# EAGLE board layout2 (EAGLE 6.5.0)
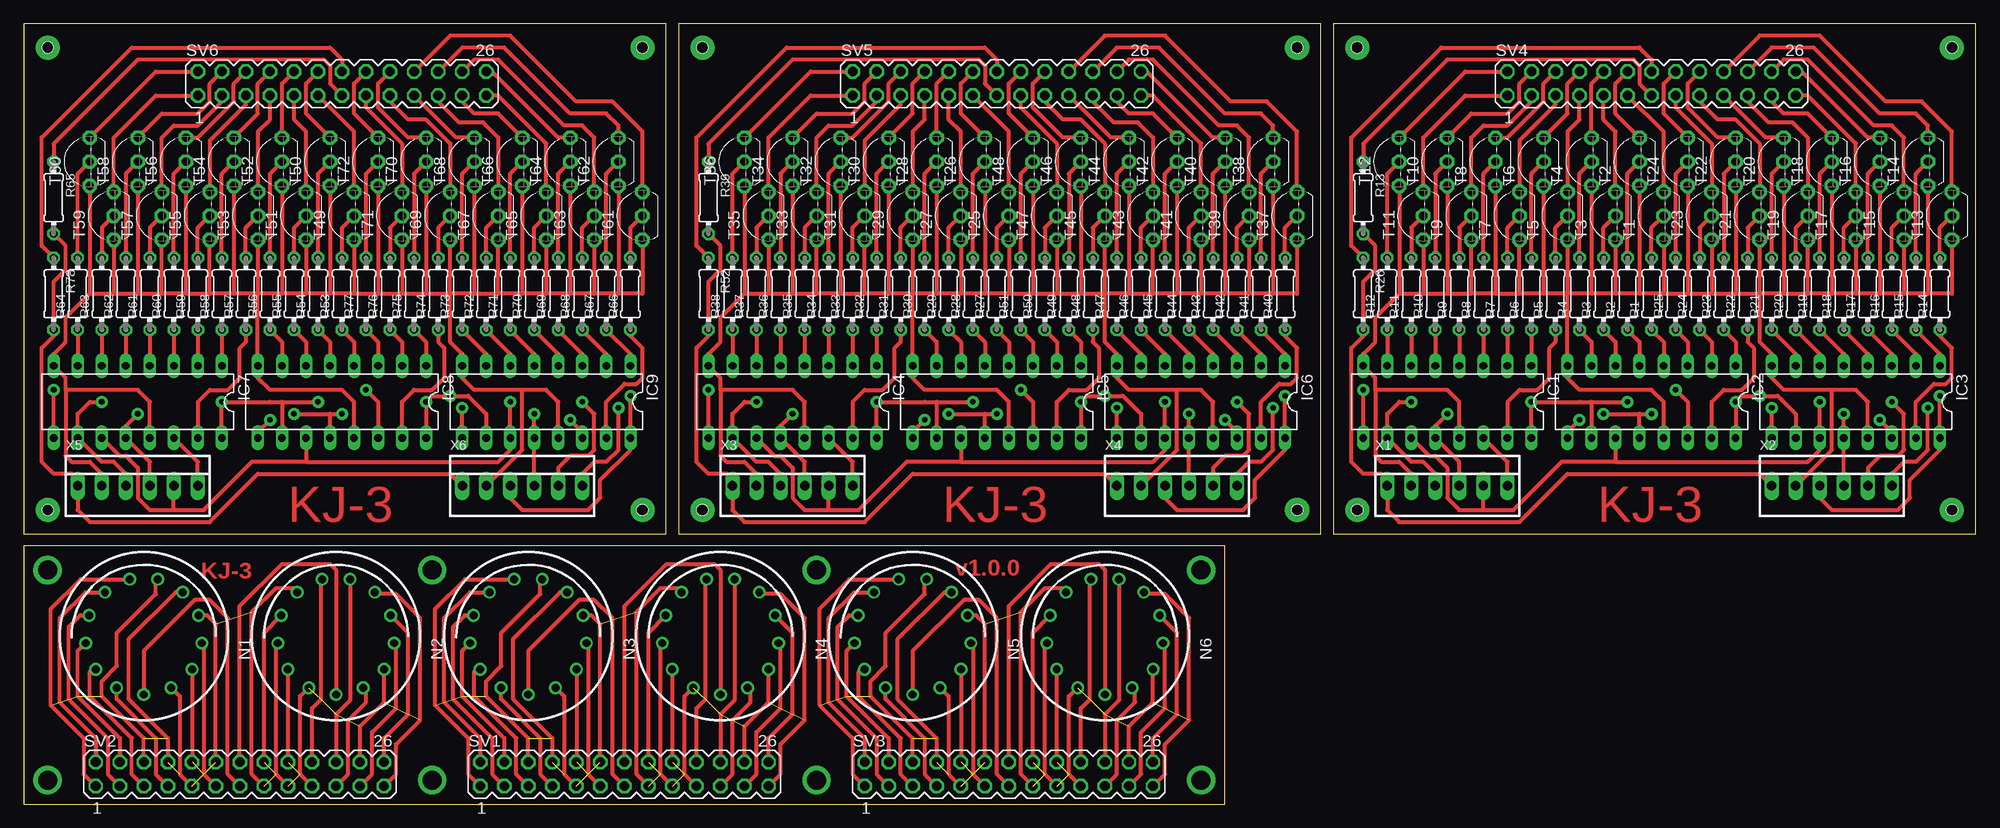
[diagram p0: board, top side]
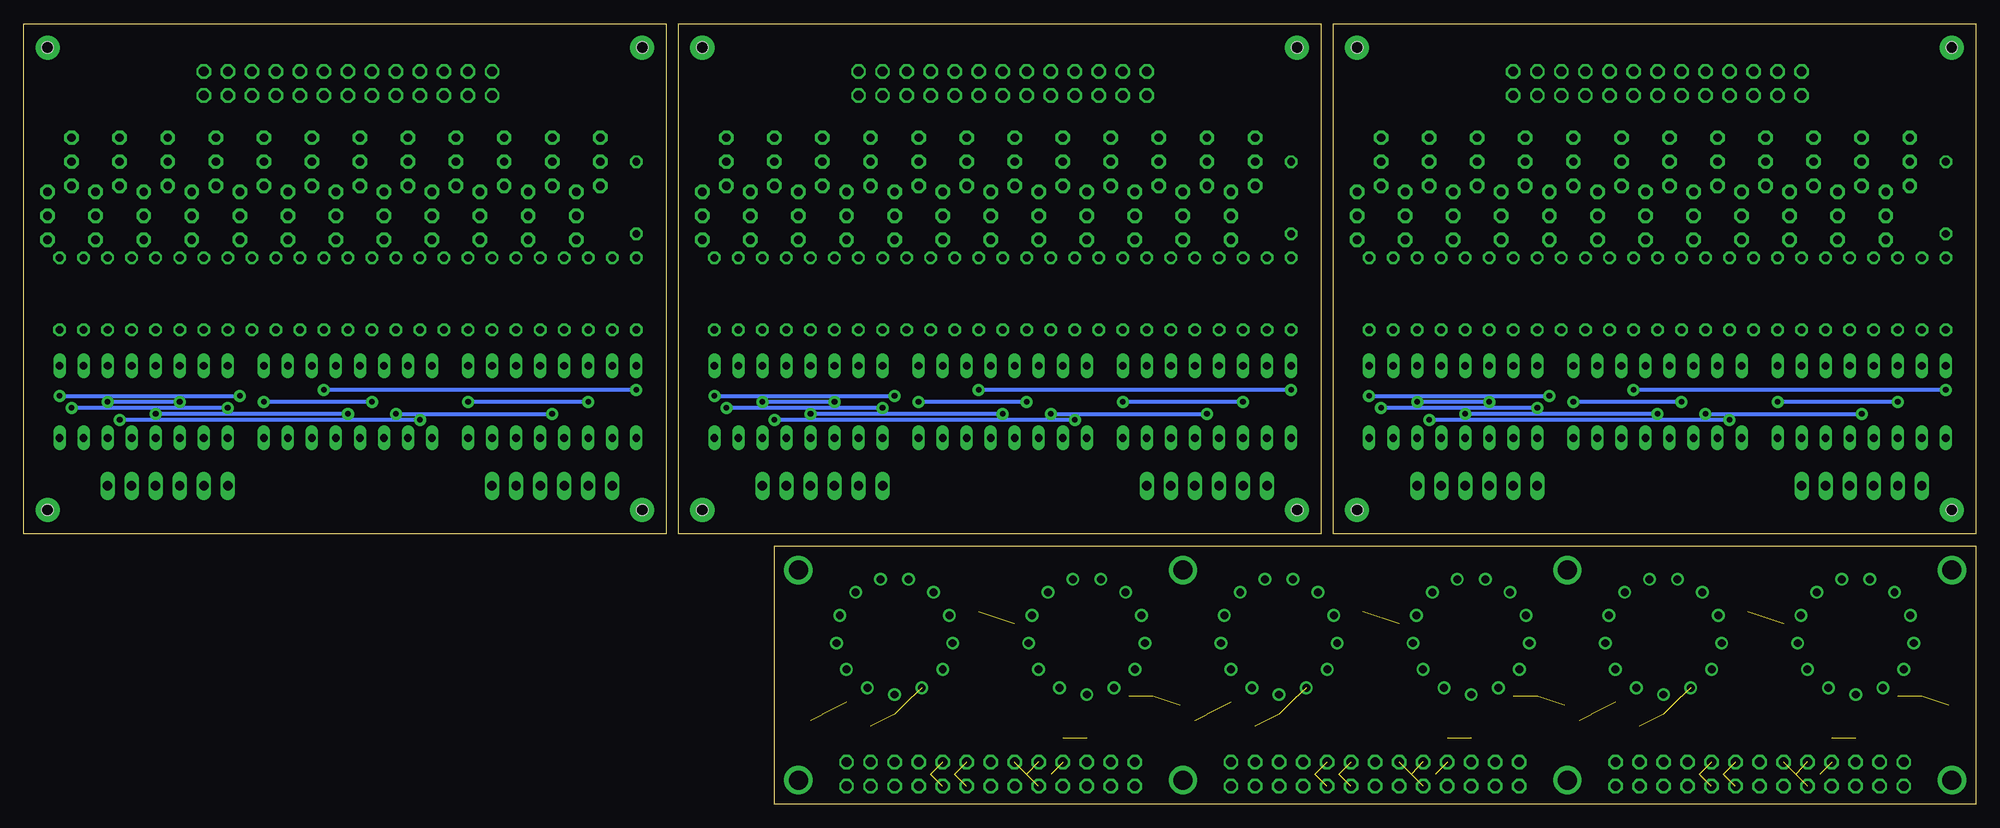
[diagram p1: board, bottom side, seen from below]

Size 206.36 x 82.54 mm. Coordinates in mm from the lower left corner, seen from the top.
Outline: 0,0 126.99,0 126.99,27.3 0,27.3 0,0
Outline: 138.43,28.57 206.36,28.57 206.36,82.54 138.43,82.54 138.43,28.57
Outline: 69.22,28.57 137.15,28.57 137.15,82.54 69.22,82.54 69.22,28.57
Outline: 0,28.57 67.93,28.57 67.93,82.54 0,82.54 0,28.57
Copper layers (1*16): Top 0.035mm / dielectric 1.5mm / Bottom 0.035mm
Design rules "default": minimum track width 10mil, minimum drill 24mil, track to track 8mil, track to pad 8mil, pad to pad 8mil, via to via 8mil, smd to smd 8mil, copper to edge 40mil, drill to drill 8mil, minimum pad ring 10mil, minimum via ring 8mil, stop-mask expansion 4mil, vias tented up to drill 0mil, thermal gap 10mil
Holes 1.2 mm at 140.97,31.11 140.97,80.01 203.83,80.01 203.83,31.11 71.76,31.11 71.76,80.01 134.62,80.01 134.62,31.11 2.54,31.11 2.54,80.01 65.41,80.01 65.41,31.11

## Footprints (pad centres in the part's own frame; a part is rotated, then mirrored left to right if it is on the bottom)
DIL16 = drill 0.813 long: 1 -8.89,-3.81; 2 -6.35,-3.81; 3 -3.81,-3.81; 4 -1.27,-3.81; 5 1.27,-3.81; 6 3.81,-3.81; 7 6.35,-3.81; 8 8.89,-3.81; 9 8.89,3.81; 10 6.35,3.81; 11 3.81,3.81; 12 1.27,3.81; 13 -1.27,3.81; 14 -3.81,3.81; 15 -6.35,3.81; 16 -8.89,3.81
IN-14 = drill 0.84: 0 5.094,-3.516; 1 -5.094,-3.516; 2 -6.145,-0.746; 3 -5.788,2.195; 4 -4.105,4.633; 5 -1.481,6.01; 6 1.481,6.01; 7 4.105,4.633; 8 5.788,2.195; 9 6.145,-0.746; A 0,-6.19; LHDP 2.877,-5.481; RHDP -2.877,-5.481
0204/7 = drill 0.813 octagon: 1 -3.81,0; 2 3.81,0
MA13-2 = drill 1.016 octagon: 1 -15.24,-1.27; 2 -15.24,1.27; 3 -12.7,-1.27; 4 -12.7,1.27; 5 -10.16,-1.27; 6 -10.16,1.27; 7 -7.62,-1.27; 8 -7.62,1.27; 9 -5.08,-1.27; 10 -5.08,1.27; 11 -2.54,-1.27; 12 -2.54,1.27; 13 0,-1.27; 14 0,1.27; 15 2.54,-1.27; 16 2.54,1.27; 17 5.08,-1.27; 18 5.08,1.27; 19 7.62,-1.27; 20 7.62,1.27; 21 10.16,-1.27; 22 10.16,1.27; 23 12.7,-1.27; 24 12.7,1.27; 25 15.24,-1.27; 26 15.24,1.27
TO92-EBC = drill 0.889 pad 1.524 octagon: B 0,-1.27; C 2.54,-1.27; E -2.54,-1.27
22-23-2061 = drill 1 long: 1 -6.35,0; 2 -3.81,0; 3 -1.27,0; 4 1.27,0; 5 3.81,0; 6 6.35,0

## Placement (x,y rotation side)
IC1  74LS595N  [DIL16]  150.49,42.54 180 top
IC2  74LS595N  [DIL16]  172.08,42.54 180 top
IC3  74LS595N  [DIL16]  193.67,42.54 180 top
IC4  74LS595N  [DIL16]  81.28,42.54 180 top
IC5  74LS595N  [DIL16]  102.87,42.54 180 top
IC6  74LS595N  [DIL16]  124.46,42.54 180 top
IC7  74LS595N  [DIL16]  12.07,42.54 180 top
IC8  74LS595N  [DIL16]  33.65,42.54 180 top
IC9  74LS595N  [DIL16]  55.24,42.54 180 top
N1  IN-14  [IN-14]  12.7,17.78 0 top
N2  IN-14  [IN-14]  33.02,17.78 0 top
N3  IN-14  [IN-14]  53.34,17.78 0 top
N4  IN-14  [IN-14]  73.66,17.78 0 top
N5  IN-14  [IN-14]  93.98,17.78 0 top
N6  IN-14  [IN-14]  114.3,17.78 0 top
R1  [0204/7]  172.08,53.97 90 top
R2  [0204/7]  169.54,53.97 90 top
R3  [0204/7]  167,53.97 90 top
R4  [0204/7]  164.47,53.97 90 top
R5  [0204/7]  161.92,53.97 90 top
R6  [0204/7]  159.38,53.97 90 top
R7  [0204/7]  156.84,53.97 90 top
R8  [0204/7]  154.3,53.97 90 top
R9  [0204/7]  151.76,53.97 90 top
R10  [0204/7]  149.22,53.97 90 top
R11  [0204/7]  146.69,53.97 90 top
R12  [0204/7]  144.14,53.97 90 top
R13  [0204/7]  141.6,64.13 270 top
R14  [0204/7]  202.56,53.97 90 top
R15  [0204/7]  200.02,53.97 90 top
R16  [0204/7]  197.48,53.97 90 top
R17  [0204/7]  194.94,53.97 90 top
R18  [0204/7]  192.41,53.97 90 top
R19  [0204/7]  189.86,53.97 90 top
R20  [0204/7]  187.32,53.97 90 top
R21  [0204/7]  184.78,53.97 90 top
R22  [0204/7]  182.24,53.97 90 top
R23  [0204/7]  179.7,53.97 90 top
R24  [0204/7]  177.16,53.97 90 top
R25  [0204/7]  174.62,53.97 90 top
R26  [0204/7]  141.6,53.97 270 top
R27  [0204/7]  102.87,53.97 90 top
R28  [0204/7]  100.33,53.97 90 top
R29  [0204/7]  97.79,53.97 90 top
R30  [0204/7]  95.25,53.97 90 top
R31  [0204/7]  92.71,53.97 90 top
R32  [0204/7]  90.17,53.97 90 top
R33  [0204/7]  87.63,53.97 90 top
R34  [0204/7]  85.09,53.97 90 top
R35  [0204/7]  82.55,53.97 90 top
R36  [0204/7]  80.01,53.97 90 top
R37  [0204/7]  77.47,53.97 90 top
R38  [0204/7]  74.93,53.97 90 top
R39  [0204/7]  72.39,64.13 270 top
R40  [0204/7]  133.35,53.97 90 top
R41  [0204/7]  130.81,53.97 90 top
R42  [0204/7]  128.27,53.97 90 top
R43  [0204/7]  125.73,53.97 90 top
R44  [0204/7]  123.19,53.97 90 top
R45  [0204/7]  120.65,53.97 90 top
R46  [0204/7]  118.11,53.97 90 top
R47  [0204/7]  115.57,53.97 90 top
R48  [0204/7]  113.03,53.97 90 top
R49  [0204/7]  110.49,53.97 90 top
R50  [0204/7]  107.95,53.97 90 top
R51  [0204/7]  105.41,53.97 90 top
R52  [0204/7]  72.39,53.97 270 top
R53  [0204/7]  33.65,53.97 90 top
R54  [0204/7]  31.11,53.97 90 top
R55  [0204/7]  28.57,53.97 90 top
R56  [0204/7]  26.04,53.97 90 top
R57  [0204/7]  23.5,53.97 90 top
R58  [0204/7]  20.96,53.97 90 top
R59  [0204/7]  18.41,53.97 90 top
R60  [0204/7]  15.88,53.97 90 top
R61  [0204/7]  13.34,53.97 90 top
R62  [0204/7]  10.79,53.97 90 top
R63  [0204/7]  8.26,53.97 90 top
R64  [0204/7]  5.71,53.97 90 top
R65  [0204/7]  3.17,64.13 270 top
R66  [0204/7]  64.14,53.97 90 top
R67  [0204/7]  61.59,53.97 90 top
R68  [0204/7]  59.05,53.97 90 top
R69  [0204/7]  56.51,53.97 90 top
R70  [0204/7]  53.97,53.97 90 top
R71  [0204/7]  51.43,53.97 90 top
R72  [0204/7]  48.89,53.97 90 top
R73  [0204/7]  46.35,53.97 90 top
R74  [0204/7]  43.81,53.97 90 top
R75  [0204/7]  41.27,53.97 90 top
R76  [0204/7]  38.73,53.97 90 top
R77  [0204/7]  36.2,53.97 90 top
R78  [0204/7]  3.18,53.97 270 top
SV1  [MA13-2]  63.5,3.18 0 top
SV2  [MA13-2]  22.86,3.18 0 top
SV3  [MA13-2]  104.14,3.18 0 top
SV4  [MA13-2]  172.08,76.2 0 top
SV5  [MA13-2]  102.87,76.2 0 top
SV6  [MA13-2]  33.65,76.2 0 top
T1  [TO92-EBC]  172.08,62.23 90 top
T2  [TO92-EBC]  169.54,67.95 90 top
T3  [TO92-EBC]  167,62.23 90 top
T4  [TO92-EBC]  164.47,67.95 90 top
T5  [TO92-EBC]  161.92,62.23 90 top
T6  [TO92-EBC]  159.38,67.95 90 top
T7  [TO92-EBC]  156.84,62.23 90 top
T8  [TO92-EBC]  154.3,67.95 90 top
T9  [TO92-EBC]  151.76,62.23 90 top
T10  [TO92-EBC]  149.22,67.95 90 top
T11  [TO92-EBC]  146.69,62.23 90 top
T12  [TO92-EBC]  144.14,67.95 90 top
T13  [TO92-EBC]  202.56,62.23 90 top
T14  [TO92-EBC]  200.02,67.95 90 top
T15  [TO92-EBC]  197.48,62.23 90 top
T16  [TO92-EBC]  194.94,67.95 90 top
T17  [TO92-EBC]  192.41,62.23 90 top
T18  [TO92-EBC]  189.86,67.95 90 top
T19  [TO92-EBC]  187.32,62.23 90 top
T20  [TO92-EBC]  184.78,67.95 90 top
T21  [TO92-EBC]  182.24,62.23 90 top
T22  [TO92-EBC]  179.7,67.95 90 top
T23  [TO92-EBC]  177.16,62.23 90 top
T24  [TO92-EBC]  174.62,67.95 90 top
T25  [TO92-EBC]  102.87,62.23 90 top
T26  [TO92-EBC]  100.33,67.95 90 top
T27  [TO92-EBC]  97.79,62.23 90 top
T28  [TO92-EBC]  95.25,67.95 90 top
T29  [TO92-EBC]  92.71,62.23 90 top
T30  [TO92-EBC]  90.17,67.95 90 top
T31  [TO92-EBC]  87.63,62.23 90 top
T32  [TO92-EBC]  85.09,67.95 90 top
T33  [TO92-EBC]  82.55,62.23 90 top
T34  [TO92-EBC]  80.01,67.95 90 top
T35  [TO92-EBC]  77.47,62.23 90 top
T36  [TO92-EBC]  74.93,67.95 90 top
T37  [TO92-EBC]  133.35,62.23 90 top
T38  [TO92-EBC]  130.81,67.95 90 top
T39  [TO92-EBC]  128.27,62.23 90 top
T40  [TO92-EBC]  125.73,67.95 90 top
T41  [TO92-EBC]  123.19,62.23 90 top
T42  [TO92-EBC]  120.65,67.95 90 top
T43  [TO92-EBC]  118.11,62.23 90 top
T44  [TO92-EBC]  115.57,67.95 90 top
T45  [TO92-EBC]  113.03,62.23 90 top
T46  [TO92-EBC]  110.49,67.95 90 top
T47  [TO92-EBC]  107.95,62.23 90 top
T48  [TO92-EBC]  105.41,67.95 90 top
T49  [TO92-EBC]  33.65,62.23 90 top
T50  [TO92-EBC]  31.11,67.95 90 top
T51  [TO92-EBC]  28.57,62.23 90 top
T52  [TO92-EBC]  26.04,67.95 90 top
T53  [TO92-EBC]  23.5,62.23 90 top
T54  [TO92-EBC]  20.96,67.95 90 top
T55  [TO92-EBC]  18.41,62.23 90 top
T56  [TO92-EBC]  15.88,67.95 90 top
T57  [TO92-EBC]  13.34,62.23 90 top
T58  [TO92-EBC]  10.79,67.95 90 top
T59  [TO92-EBC]  8.26,62.23 90 top
T60  [TO92-EBC]  5.71,67.95 90 top
T61  [TO92-EBC]  64.14,62.23 90 top
T62  [TO92-EBC]  61.59,67.95 90 top
T63  [TO92-EBC]  59.05,62.23 90 top
T64  [TO92-EBC]  56.51,67.95 90 top
T65  [TO92-EBC]  53.97,62.23 90 top
T66  [TO92-EBC]  51.43,67.95 90 top
T67  [TO92-EBC]  48.89,62.23 90 top
T68  [TO92-EBC]  46.35,67.95 90 top
T69  [TO92-EBC]  43.81,62.23 90 top
T70  [TO92-EBC]  41.27,67.95 90 top
T71  [TO92-EBC]  38.73,62.23 90 top
T72  [TO92-EBC]  36.2,67.95 90 top
X1  [22-23-2061]  150.49,33.65 0 top
X2  [22-23-2061]  191.13,33.65 0 top
X3  [22-23-2061]  81.28,33.65 0 top
X4  [22-23-2061]  121.92,33.65 0 top
X5  [22-23-2061]  12.07,33.65 0 top
X6  [22-23-2061]  52.7,33.65 0 top

## Library data of the parts
IC1-IC9 = 74xx-us
N1-N6 = russian-nixies
R1-R78 = resistor
SV1-SV6 = con-lstb; OC_FARNELL: unknown; OC_NEWARK: unknown
T1-T72 = transistor
X1-X6 = con-molex; MF: MOLEX; MPN: 22-23-2061; OC_FARNELL: 1462922; OC_NEWARK: 27C1933

## Nets
GND: IC1.8 IC1.13 IC2.8 IC2.13 IC3.8 IC3.13 T1.E T2.E T3.E T4.E T5.E T6.E T7.E T8.E T9.E T10.E T11.E T12.E T13.E T14.E T15.E T16.E T17.E T18.E T19.E T20.E T21.E T22.E T23.E T24.E X1.2 X2.2
GND1: IC4.8 IC4.13 IC5.8 IC5.13 IC6.8 IC6.13 T25.E T26.E T27.E T28.E T29.E T30.E T31.E T32.E T33.E T34.E T35.E T36.E T37.E T38.E T39.E T40.E T41.E T42.E T43.E T44.E T45.E T46.E T47.E T48.E X3.2 X4.2
GND2: IC7.8 IC7.13 IC8.8 IC8.13 IC9.8 IC9.13 T49.E T50.E T51.E T52.E T53.E T54.E T55.E T56.E T57.E T58.E T59.E T60.E T61.E T62.E T63.E T64.E T65.E T66.E T67.E T68.E T69.E T70.E T71.E T72.E X5.2 X6.2
N$1: N1.A SV2.13
N$2: N2.A SV2.14
N$3: N1.0 N1.1 N1.2 N1.3 N1.4 N1.5 N1.6 N1.7 N1.8 N1.9 N1.LHDP N1.RHDP N2.0 N2.1 N2.2 N2.3 N2.4 N2.5 N2.6 N2.7 N2.8 N2.9 N2.LHDP N2.RHDP SV2.1 SV2.2 SV2.3 SV2.4 SV2.5 SV2.6 SV2.7 SV2.8 SV2.9 SV2.10 SV2.11 SV2.12 SV2.15 SV2.16 SV2.17 SV2.18 SV2.19 SV2.20 SV2.21 SV2.22 SV2.23 SV2.24 SV2.25 SV2.26
N$4: N3.A SV1.13
N$5: N4.A SV1.14
N$10: N3.0 N3.1 N3.2 N3.3 N3.4 N3.5 N3.6 N3.7 N3.8 N3.9 N3.LHDP N3.RHDP N4.0 N4.1 N4.2 N4.3 N4.4 N4.5 N4.6 N4.7 N4.8 N4.9 N4.LHDP N4.RHDP SV1.1 SV1.2 SV1.3 SV1.4 SV1.5 SV1.6 SV1.7 SV1.8 SV1.9 SV1.10 SV1.11 SV1.12 SV1.15 SV1.16 SV1.17 SV1.18 SV1.19 SV1.20 SV1.21 SV1.22 SV1.23 SV1.24 SV1.25 SV1.26
N$13: N5.A SV3.13
N$14: N6.A SV3.14
N$15: N5.0 N5.1 N5.2 N5.3 N5.4 N5.5 N5.6 N5.7 N5.8 N5.9 N5.LHDP N5.RHDP N6.0 N6.1 N6.2 N6.3 N6.4 N6.5 N6.6 N6.7 N6.8 N6.9 N6.LHDP N6.RHDP SV3.1 SV3.2 SV3.3 SV3.4 SV3.5 SV3.6 SV3.7 SV3.8 SV3.9 SV3.10 SV3.11 SV3.12 SV3.15 SV3.16 SV3.17 SV3.18 SV3.19 SV3.20 SV3.21 SV3.22 SV3.23 SV3.24 SV3.25 SV3.26
N$16: R12.2 T12.B
N$17: R11.2 T11.B
N$18: R10.2 T10.B
N$19: R9.2 T9.B
N$20: R8.2 T8.B
N$21: R7.2 T7.B
N$22: R6.2 T6.B
N$23: R5.2 T5.B
N$24: R4.2 T4.B
N$25: R3.2 T3.B
N$26: R2.2 T2.B
N$27: R1.2 T1.B
N$28: SV4.3 T9.C
N$29: SV4.6 T8.C
N$30: SV4.5 T7.C
N$31: SV4.12 T2.C
N$32: SV4.9 T3.C
N$33: SV4.8 T6.C
N$34: SV4.7 T5.C
N$35: SV4.10 T4.C
N$36: R25.2 T24.B
N$37: R24.2 T23.B
N$38: R23.2 T22.B
N$39: R22.2 T21.B
N$40: R21.2 T20.B
N$41: R20.2 T19.B
N$42: R19.2 T18.B
N$43: R18.2 T17.B
N$44: R17.2 T16.B
N$45: R16.2 T15.B
N$46: R15.2 T14.B
N$47: R14.2 T13.B
N$48: SV4.16 T24.C
N$49: SV4.15 T23.C
N$50: SV4.18 T22.C
N$51: SV4.17 T21.C
N$52: SV4.19 T20.C
N$53: SV4.21 T19.C
N$54: SV4.20 T13.C
N$55: SV4.22 T14.C
N$56: SV4.24 T15.C
N$57: SV4.23 T18.C
N$58: SV4.25 T17.C
N$59: SV4.26 T16.C
N$60: R13.2 R26.2 X1.1 X2.1
N$61: IC1.9 IC2.14
N$62: IC2.9 IC3.14
N$63: IC3.9 X2.6
N$64: IC1.14 X1.6
N$65: IC1.11 IC2.11 IC3.11 X1.5 X2.5
N$66: IC1.12 IC2.12 IC3.12 X1.4 X2.4
N$67: SV4.11 T1.C
N$68: R26.1 SV4.14
N$69: R13.1 SV4.13
N$70: SV4.2 T12.C
N$71: SV4.1 T11.C
N$72: SV4.4 T10.C
N$75: IC1.7 R12.1
N$76: IC1.6 R11.1
N$77: IC1.5 R10.1
N$78: IC1.4 R9.1
N$79: IC1.3 R8.1
N$80: IC1.2 R7.1
N$81: IC1.1 R6.1
N$82: IC1.15 R5.1
N$84: IC2.7 R4.1
N$85: IC2.6 R3.1
N$86: IC2.5 R2.1
N$87: IC2.4 R1.1
N$88: IC2.3 R25.1
N$89: IC2.2 R24.1
N$90: IC2.1 R23.1
N$91: IC2.15 R22.1
N$92: IC3.7 R21.1
N$93: IC3.6 R20.1
N$94: IC3.5 R19.1
N$95: IC3.4 R18.1
N$96: IC3.3 R17.1
N$97: IC3.2 R16.1
N$98: IC3.1 R15.1
N$99: IC3.15 R14.1
N$101: R38.2 T36.B
N$102: R37.2 T35.B
N$103: R36.2 T34.B
N$104: R35.2 T33.B
N$105: R34.2 T32.B
N$106: R33.2 T31.B
N$107: R32.2 T30.B
N$108: R31.2 T29.B
N$109: R30.2 T28.B
N$110: R29.2 T27.B
N$111: R28.2 T26.B
N$112: R27.2 T25.B
N$113: SV5.3 T33.C
N$114: SV5.6 T32.C
N$115: SV5.5 T31.C
N$116: SV5.12 T26.C
N$117: SV5.9 T27.C
N$118: SV5.8 T30.C
N$119: SV5.7 T29.C
N$120: SV5.10 T28.C
N$121: R51.2 T48.B
N$122: R50.2 T47.B
N$123: R49.2 T46.B
N$124: R48.2 T45.B
N$125: R47.2 T44.B
N$126: R46.2 T43.B
N$127: R45.2 T42.B
N$128: R44.2 T41.B
N$129: R43.2 T40.B
N$130: R42.2 T39.B
N$131: R41.2 T38.B
N$132: R40.2 T37.B
N$133: SV5.16 T48.C
N$134: SV5.15 T47.C
N$135: SV5.18 T46.C
N$136: SV5.17 T45.C
N$137: SV5.19 T44.C
N$138: SV5.21 T43.C
N$139: SV5.20 T37.C
N$140: SV5.22 T38.C
N$141: SV5.24 T39.C
N$142: SV5.23 T42.C
N$143: SV5.25 T41.C
N$144: SV5.26 T40.C
N$145: IC4.7 R38.1
N$146: IC4.6 R37.1
N$147: IC4.5 R36.1
N$148: IC4.4 R35.1
N$149: IC4.3 R34.1
N$150: IC4.2 R33.1
N$151: IC4.1 R32.1
N$152: IC4.15 R31.1
N$153: IC5.7 R30.1
N$154: IC5.6 R29.1
N$155: IC5.5 R28.1
N$156: IC5.4 R27.1
N$157: IC5.3 R51.1
N$158: IC5.2 R50.1
N$159: IC5.1 R49.1
N$160: IC5.15 R48.1
N$161: IC6.7 R47.1
N$162: IC6.6 R46.1
N$163: IC6.5 R45.1
N$164: IC6.4 R44.1
N$165: IC6.3 R43.1
N$166: IC6.2 R42.1
N$167: IC6.1 R41.1
N$168: IC6.15 R40.1
N$169: R39.2 R52.2 X3.1 X4.1
N$170: IC4.9 IC5.14
N$171: IC5.9 IC6.14
N$172: IC6.9 X4.6
N$173: IC4.14 X3.6
N$174: IC4.11 IC5.11 IC6.11 X3.5 X4.5
N$175: IC4.12 IC5.12 IC6.12 X3.4 X4.4
N$176: SV5.11 T25.C
N$177: R52.1 SV5.14
N$178: R39.1 SV5.13
N$179: SV5.2 T36.C
N$180: SV5.1 T35.C
N$181: SV5.4 T34.C
N$186: R64.2 T60.B
N$187: R63.2 T59.B
N$188: R62.2 T58.B
N$189: R61.2 T57.B
N$190: R60.2 T56.B
N$191: R59.2 T55.B
N$192: R58.2 T54.B
N$193: R57.2 T53.B
N$194: R56.2 T52.B
N$195: R55.2 T51.B
N$196: R54.2 T50.B
N$197: R53.2 T49.B
N$198: SV6.3 T57.C
N$199: SV6.6 T56.C
N$200: SV6.5 T55.C
N$201: SV6.12 T50.C
N$202: SV6.9 T51.C
N$203: SV6.8 T54.C
N$204: SV6.7 T53.C
N$205: SV6.10 T52.C
N$206: R77.2 T72.B
N$207: R76.2 T71.B
N$208: R75.2 T70.B
N$209: R74.2 T69.B
N$210: R73.2 T68.B
N$211: R72.2 T67.B
N$212: R71.2 T66.B
N$213: R70.2 T65.B
N$214: R69.2 T64.B
N$215: R68.2 T63.B
N$216: R67.2 T62.B
N$217: R66.2 T61.B
N$218: SV6.16 T72.C
N$219: SV6.15 T71.C
N$220: SV6.18 T70.C
N$221: SV6.17 T69.C
N$222: SV6.19 T68.C
N$223: SV6.21 T67.C
N$224: SV6.20 T61.C
N$225: SV6.22 T62.C
N$226: SV6.24 T63.C
N$227: SV6.23 T66.C
N$228: SV6.25 T65.C
N$229: SV6.26 T64.C
N$230: IC7.7 R64.1
N$231: IC7.6 R63.1
N$232: IC7.5 R62.1
N$233: IC7.4 R61.1
N$234: IC7.3 R60.1
N$235: IC7.2 R59.1
N$236: IC7.1 R58.1
N$237: IC7.15 R57.1
N$238: IC8.7 R56.1
N$239: IC8.6 R55.1
N$240: IC8.5 R54.1
N$241: IC8.4 R53.1
N$242: IC8.3 R77.1
N$243: IC8.2 R76.1
N$244: IC8.1 R75.1
N$245: IC8.15 R74.1
N$246: IC9.7 R73.1
N$247: IC9.6 R72.1
N$248: IC9.5 R71.1
N$249: IC9.4 R70.1
N$250: IC9.3 R69.1
N$251: IC9.2 R68.1
N$252: IC9.1 R67.1
N$253: IC9.15 R66.1
N$254: R65.2 R78.2 X5.1 X6.1
N$255: IC7.9 IC8.14
N$256: IC8.9 IC9.14
N$257: IC9.9 X6.6
N$258: IC7.14 X5.6
N$259: IC7.11 IC8.11 IC9.11 X5.5 X6.5
N$260: IC7.12 IC8.12 IC9.12 X5.4 X6.4
N$261: SV6.11 T49.C
N$262: R78.1 SV6.14
N$263: R65.1 SV6.13
N$264: SV6.2 T60.C
N$265: SV6.1 T59.C
N$266: SV6.4 T58.C
VCC: IC1.10 IC1.16 IC2.10 IC2.16 IC3.10 IC3.16 X1.3 X2.3
VCC1: IC4.10 IC4.16 IC5.10 IC5.16 IC6.10 IC6.16 X3.3 X4.3
VCC2: IC7.10 IC7.16 IC8.10 IC8.16 IC9.10 IC9.16 X5.3 X6.3

## Tracks (layer width: path | path; a pad name or v marks a point on that pad's centre or on a via)
GND
  Top 0.406: T11.E 147.95,53.97 | 147.95,53.97 150.49,53.97 | 150.49,53.97 153.03,53.97 | 153.03,53.97 T9.E | T10.E 150.49,53.97 | T12.E 145.41,53.97 | 145.41,53.97 147.95,53.97 | T8.E 155.57,53.97 | 155.57,53.97 158.11,53.97 | 158.11,53.97 T7.E | T5.E 163.19,53.97 | 163.19,53.97 160.66,53.97 | 160.66,53.97 158.11,53.97 | T3.E 168.27,53.97 | 168.27,53.97 165.73,53.97 | 165.73,53.97 163.19,53.97 | 155.57,53.97 153.03,53.97 | 173.35,53.97 170.81,53.97 | 170.81,53.97 168.27,53.97 | T2.E 170.81,53.97 | T4.E 165.73,53.97 | T6.E 160.66,53.97 | T23.E 178.44,53.97 | 178.44,53.97 180.97,53.97 | 180.97,53.97 183.51,53.97 | 183.51,53.97 T21.E | T22.E 180.97,53.97 | T24.E 175.89,53.97 | 175.89,53.97 178.44,53.97 | T20.E 186.05,53.97 | 186.05,53.97 188.59,53.97 | 188.59,53.97 T19.E | T17.E 193.67,53.97 | 193.67,53.97 191.13,53.97 | 191.13,53.97 188.59,53.97 | T15.E 198.75,53.97 | 198.75,53.97 196.22,53.97 | 196.22,53.97 193.67,53.97 | 186.05,53.97 183.51,53.97 | T13.E 203.83,53.97 201.29,53.97 | 201.29,53.97 198.75,53.97 | T14.E 201.29,53.97 | T16.E 196.22,53.97 | T18.E 191.13,53.97 | 163.19,53.97 IC2.8 163.19,45.08 164.47,43.81 172.08,43.81 173.35,42.54 IC2.13 | 183.51,53.97 183.51,48.89 184.78,47.62 IC3.8 184.78,45.08 186.05,43.81 191.13,43.81 | T1.E 173.35,53.97 | 173.35,53.97 175.89,53.97 | 142.88,43.81 142.88,36.83 143.51,36.2 145.41,36.2 146.69,34.92 X1.2 | IC1.13 151.76,42.54 150.49,43.81 142.88,43.81 | 142.88,43.81 142.88,45.08 IC1.8 141.6,47.62 142.88,48.89 142.88,51.43 145.41,53.97 | IC3.13 194.94,42.54 193.67,43.81 191.13,43.81 | 191.13,43.81 191.13,37.46 X2.2
GND1
  Top 0.406: T35.E 78.74,53.97 | 78.74,53.97 81.28,53.97 | 81.28,53.97 83.82,53.97 | 83.82,53.97 T33.E | T34.E 81.28,53.97 | T36.E 76.2,53.97 | 76.2,53.97 78.74,53.97 | T32.E 86.36,53.97 | 86.36,53.97 88.9,53.97 | 88.9,53.97 T31.E | T29.E 93.98,53.97 | 93.98,53.97 91.44,53.97 | 91.44,53.97 88.9,53.97 | T27.E 99.06,53.97 | 99.06,53.97 96.52,53.97 | 96.52,53.97 93.98,53.97 | 86.36,53.97 83.82,53.97 | 104.14,53.97 101.6,53.97 | 101.6,53.97 99.06,53.97 | T26.E 101.6,53.97 | T28.E 96.52,53.97 | T30.E 91.44,53.97 | T47.E 109.22,53.97 | 109.22,53.97 111.76,53.97 | 111.76,53.97 114.3,53.97 | 114.3,53.97 T45.E | T46.E 111.76,53.97 | T48.E 106.68,53.97 | 106.68,53.97 109.22,53.97 | T44.E 116.84,53.97 | 116.84,53.97 119.38,53.97 | 119.38,53.97 T43.E | T41.E 124.46,53.97 | 124.46,53.97 121.92,53.97 | 121.92,53.97 119.38,53.97 | T39.E 129.54,53.97 | 129.54,53.97 127,53.97 | 127,53.97 124.46,53.97 | 116.84,53.97 114.3,53.97 | T37.E 134.62,53.97 132.08,53.97 | 132.08,53.97 129.54,53.97 | T38.E 132.08,53.97 | T40.E 127,53.97 | T42.E 121.92,53.97 | 93.98,53.97 IC5.8 93.98,45.08 95.25,43.81 102.87,43.81 104.14,42.54 IC5.13 | 114.3,53.97 114.3,48.89 115.57,47.62 IC6.8 115.57,45.08 116.84,43.81 121.92,43.81 | T25.E 104.14,53.97 | 104.14,53.97 106.68,53.97 | 73.66,43.81 73.66,36.83 74.3,36.2 76.2,36.2 77.47,34.92 X3.2 | IC4.13 82.55,42.54 81.28,43.81 73.66,43.81 | 73.66,43.81 73.66,45.08 IC4.8 72.39,47.62 73.66,48.89 73.66,51.43 76.2,53.97 | IC6.13 125.73,42.54 124.46,43.81 121.92,43.81 | 121.92,43.81 121.92,37.46 X4.2
GND2
  Top 0.406: T59.E 9.53,53.97 | 9.53,53.97 12.07,53.97 | 12.07,53.97 14.61,53.97 | 14.61,53.97 T57.E | T58.E 12.07,53.97 | T60.E 6.99,53.97 | 6.99,53.97 9.53,53.97 | T56.E 17.14,53.97 | 17.14,53.97 19.68,53.97 | 19.68,53.97 T55.E | T53.E 24.77,53.97 | 24.77,53.97 22.23,53.97 | 22.23,53.97 19.68,53.97 | T51.E 29.84,53.97 | 29.84,53.97 27.3,53.97 | 27.3,53.97 24.77,53.97 | 17.14,53.97 14.61,53.97 | 34.92,53.97 32.38,53.97 | 32.38,53.97 29.84,53.97 | T50.E 32.38,53.97 | T52.E 27.3,53.97 | T54.E 22.23,53.97 | T71.E 40,53.97 | 40,53.97 42.54,53.97 | 42.54,53.97 45.08,53.97 | 45.08,53.97 T69.E | T70.E 42.54,53.97 | T72.E 37.46,53.97 | 37.46,53.97 40,53.97 | T68.E 47.62,53.97 | 47.62,53.97 50.16,53.97 | 50.16,53.97 T67.E | T65.E 55.24,53.97 | 55.24,53.97 52.7,53.97 | 52.7,53.97 50.16,53.97 | T63.E 60.32,53.97 | 60.32,53.97 57.78,53.97 | 57.78,53.97 55.24,53.97 | 47.62,53.97 45.08,53.97 | T61.E 65.41,53.97 62.87,53.97 | 62.87,53.97 60.32,53.97 | T62.E 62.87,53.97 | T64.E 57.78,53.97 | T66.E 52.7,53.97 | 24.77,53.97 IC8.8 24.77,45.08 26.04,43.81 33.65,43.81 34.92,42.54 IC8.13 | 45.08,53.97 45.08,48.89 46.35,47.62 IC9.8 46.35,45.08 47.62,43.81 52.7,43.81 | T49.E 34.92,53.97 | 34.92,53.97 37.46,53.97 | 4.45,43.81 4.45,36.83 5.08,36.2 6.99,36.2 8.26,34.92 X5.2 | IC7.13 13.34,42.54 12.07,43.81 4.45,43.81 | 4.45,43.81 4.45,45.08 IC7.8 3.18,47.62 4.45,48.89 4.45,51.43 6.99,53.97 | IC9.13 56.51,42.54 55.24,43.81 52.7,43.81 | 52.7,43.81 52.7,37.46 X6.2
N$1
  Top 0.406: N1.A 12.7,16.19 18.1,21.59 19.68,21.59 21.59,19.68 21.59,3.18 SV2.13
N$2
  Top 0.406: SV2.14 22.86,20.96 27.3,25.4 32.38,25.4 33.02,24.77 N2.A
N$3  (23 unrouted)
  Top 0.406: N1.RHDP 9.82,11.13 13.97,6.99 13.97,3.18 SV2.7 | N1.9 19.05,16.83 19.05,3.18 SV2.11 | N2.4 28.47,22.86 26.67,22.86 24.13,20.32 24.13,3.18 SV2.15 | SV2.16 25.4,18.14 N2.3 | SV2.17 26.67,3.18 26.67,16.83 N2.2 | SV2.18 N2.1 | SV2.19 29.21,3.18 29.21,11.43 30.08,12.3 N2.RHDP | SV2.20 30.48,10.16 31.43,11.11 31.43,23.68 N2.5 | N2.6 34.5,11.01 33.02,9.53 SV2.22 | SV2.21 34.29,3.18 34.29,8.89 36.2,10.79 36.2,12 N2.LHDP | SV2.24 35.56,8.26 38.1,10.79 N2.0 | SV2.23 36.83,3.18 36.83,7.62 39.37,10.16 39.37,16.83 N2.9 | SV2.26 38.1,6.99 40.64,9.53 40.64,18.14 N2.8 | SV2.25 39.37,3.18 39.37,6.35 41.91,8.89 41.91,19.68 39.37,22.23 37.31,22.23 N2.7 | N1.7 16.06,22.41 11.11,17.46 11.11,11.11 15.24,6.99 SV2.8 | N1.6 13.97,23.58 13.97,22.23 9.84,18.1 9.84,14.61 8.26,13.02 8.26,11.43 12.7,6.99 SV2.6 | N1.1 7.28,14.26 6.99,13.97 6.99,11.43 11.43,6.99 11.43,3.18 SV2.5 | N1.2 5.71,16.19 5.71,11.43 10.16,6.99 SV2.4 | N1.3 6.01,19.98 4.76,18.73 4.76,11.11 8.89,6.99 8.89,3.18 SV2.3 | N1.4 6.54,22.41 3.81,19.68 3.81,10.79 7.62,6.99 SV2.2 | N1.5 6.01,23.79 2.86,20.64 2.86,10.48 6.35,6.99 6.35,3.18 SV2.1 | SV2.12 20.32,19.05 19.39,19.98 N1.8 | N1.0 17.79,4.46 SV2.10 | N1.LHDP 15.58,12.36 16.51,11.43 16.51,3.18 SV2.9
N$4
  Top 0.406: N3.A 53.34,16.19 58.74,21.59 60.32,21.59 62.23,19.68 62.23,3.18 SV1.13
N$5
  Top 0.406: SV1.14 63.5,20.96 67.95,25.4 73.03,25.4 73.66,24.77 N4.A
N$6  (via drill 2)
  other vias: 2.54,24.77
N$7  (via drill 2)
  other vias: 2.54,2.54
N$8  (via drill 2)
  other vias: 43.18,24.77
N$9  (via drill 2)
  other vias: 43.18,2.54
N$10  (23 unrouted)
  Top 0.406: N3.RHDP 50.46,11.13 54.61,6.99 54.61,3.18 SV1.7 | N3.9 59.69,16.83 59.69,3.18 SV1.11 | N4.4 69.11,22.86 67.31,22.86 64.77,20.32 64.77,3.18 SV1.15 | SV1.16 66.04,18.14 N4.3 | SV1.17 67.31,3.18 67.31,16.83 N4.2 | SV1.18 N4.1 | SV1.19 69.85,3.18 69.85,11.43 70.72,12.3 N4.RHDP | SV1.20 71.12,10.16 72.07,11.11 72.07,23.68 N4.5 | N4.6 75.14,11.01 73.66,9.53 SV1.22 | SV1.21 74.93,3.18 74.93,8.89 76.84,10.79 76.84,12 N4.LHDP | SV1.24 76.2,8.26 78.74,10.79 N4.0 | SV1.23 77.47,3.18 77.47,7.62 80.01,10.16 80.01,16.83 N4.9 | SV1.26 78.74,6.99 81.28,9.53 81.28,18.14 N4.8 | SV1.25 80.01,3.18 80.01,6.35 82.55,8.89 82.55,19.68 80.01,22.23 77.95,22.23 N4.7 | N3.7 56.7,22.41 51.75,17.46 51.75,11.11 55.88,6.99 SV1.8 | N3.6 54.61,23.58 54.61,22.23 50.48,18.1 50.48,14.61 48.89,13.02 48.89,11.43 53.34,6.99 SV1.6 | N3.1 47.92,14.26 47.62,13.97 47.62,11.43 52.07,6.99 52.07,3.18 SV1.5 | N3.2 46.35,16.19 46.35,11.43 50.8,6.99 SV1.4 | N3.3 46.64,19.98 45.4,18.73 45.4,11.11 49.53,6.99 49.53,3.18 SV1.3 | N3.4 47.18,22.41 44.45,19.68 44.45,10.79 48.26,6.99 SV1.2 | N3.5 46.65,23.79 43.5,20.64 43.5,10.48 46.99,6.99 46.99,3.18 SV1.1 | SV1.12 60.96,19.05 60.03,19.98 N3.8 | N3.0 58.43,4.46 SV1.10 | N3.LHDP 56.22,12.36 57.15,11.43 57.15,3.18 SV1.9
N$11  (via drill 2)
  other vias: 83.82,24.77 124.46,24.77 124.46,2.54
N$12  (via drill 2)
  other vias: 83.82,2.54
N$13
  Top 0.406: N5.A 93.98,16.19 99.38,21.59 100.97,21.59 102.87,19.68 102.87,3.18 SV3.13
N$14
  Top 0.406: SV3.14 104.14,20.96 108.59,25.4 113.67,25.4 114.3,24.77 N6.A
N$15  (23 unrouted)
  Top 0.406: N5.RHDP 91.1,11.13 95.25,6.99 95.25,3.18 SV3.7 | N5.9 100.33,16.83 100.33,3.18 SV3.11 | N6.4 109.75,22.86 107.95,22.86 105.41,20.32 105.41,3.18 SV3.15 | SV3.16 106.68,18.14 N6.3 | SV3.17 107.95,3.18 107.95,16.83 N6.2 | SV3.18 N6.1 | SV3.19 110.49,3.18 110.49,11.43 111.36,12.3 N6.RHDP | SV3.20 111.76,10.16 112.71,11.11 112.71,23.68 N6.5 | N6.6 115.78,11.01 114.3,9.53 SV3.22 | SV3.21 115.57,3.18 115.57,8.89 117.48,10.79 117.48,12 N6.LHDP | SV3.24 116.84,8.26 119.38,10.79 N6.0 | SV3.23 118.11,3.18 118.11,7.62 120.65,10.16 120.65,16.83 N6.9 | SV3.26 119.38,6.99 121.92,9.53 121.92,18.14 N6.8 | SV3.25 120.65,3.18 120.65,6.35 123.19,8.89 123.19,19.68 120.65,22.23 118.59,22.23 N6.7 | N5.7 97.34,22.41 92.39,17.46 92.39,11.11 96.52,6.99 SV3.8 | N5.6 95.25,23.58 95.25,22.23 91.12,18.1 91.12,14.61 89.54,13.02 89.54,11.43 93.98,6.99 SV3.6 | N5.1 88.56,14.26 88.27,13.97 88.27,11.43 92.71,6.99 92.71,3.18 SV3.5 | N5.2 87,16.19 87,11.43 91.44,6.99 SV3.4 | N5.3 87.29,19.98 86.04,18.73 86.04,11.11 90.17,6.99 90.17,3.18 SV3.3 | N5.4 87.82,22.41 85.09,19.68 85.09,10.79 88.9,6.99 SV3.2 | N5.5 87.29,23.79 84.14,20.64 84.14,10.48 87.63,6.99 87.63,3.18 SV3.1 | SV3.12 101.6,19.05 100.67,19.98 N5.8 | N5.0 99.07,4.46 SV3.10 | N5.LHDP 96.86,12.36 97.79,11.43 97.79,3.18 SV3.9
N$16
  Top 0.406: T12.B 144.14,66.67 R12.2
N$17
  Top 0.406: T11.B 146.69,60.96 R11.2
N$18
  Top 0.406: T10.B 149.22,66.67 R10.2
N$19
  Top 0.406: T9.B 151.76,60.96 R9.2
N$20
  Top 0.406: R8.2 154.3,66.67 T8.B
N$21
  Top 0.406: R7.2 156.84,60.96 T7.B
N$22
  Top 0.406: R6.2 159.38,66.67 T6.B
N$23
  Top 0.406: R5.2 161.92,60.96 T5.B
N$24
  Top 0.406: R4.2 164.47,66.67 T4.B
N$25
  Top 0.406: R3.2 167,60.96 T3.B
N$26
  Top 0.406: R2.2 169.54,66.67 T2.B
N$27
  Top 0.406: R1.2 172.08,60.96 T1.B
N$28
  Top 0.406: T9.C 153.03,70.48 154.3,71.76 156.84,71.76 159.38,74.3 SV4.3
N$29
  Top 0.406: T8.C 156.84,70.48 160.66,74.3 160.66,76.2 SV4.6
N$30
  Top 0.406: T7.C 158.11,70.17 161.92,73.98 SV4.5
N$31
  Top 0.406: T2.C 168.27,73.03 168.27,76.2 SV4.12
N$32
  Top 0.406: T3.C 168.27,71.12 167,72.39 SV4.9
N$33
  Top 0.406: T6.C 163.19,73.03 163.19,76.2 SV4.8
N$34
  Top 0.406: T5.C 163.19,71.12 164.47,72.39 SV4.7
N$35
  Top 0.406: T4.C 165.73,76.2 SV4.10
N$36
  Top 0.406: T24.B 174.62,66.67 R25.2
N$37
  Top 0.406: T23.B 177.16,60.96 R24.2
N$38
  Top 0.406: T22.B 179.7,66.67 R23.2
N$39
  Top 0.406: T21.B 182.24,60.96 R22.2
N$40
  Top 0.406: R21.2 184.78,66.67 T20.B
N$41
  Top 0.406: R20.2 187.32,60.96 T19.B
N$42
  Top 0.406: R19.2 189.86,66.67 T18.B
N$43
  Top 0.406: R18.2 192.41,60.96 T17.B
N$44
  Top 0.406: R17.2 194.94,66.67 T16.B
N$45
  Top 0.406: R16.2 197.48,60.96 T15.B
N$46
  Top 0.406: R15.2 200.02,66.67 T14.B
N$47
  Top 0.406: R14.2 202.56,60.96 T13.B
N$48
  Top 0.406: T24.C 173.35,73.03 173.35,76.2 SV4.16
N$49
  Top 0.406: T23.C 178.44,69.85 174.62,73.66 SV4.15
N$50
  Top 0.406: T22.C 179.07,70.48 175.89,73.66 175.89,76.2 SV4.18
N$51
  Top 0.406: T21.C 183.51,69.85 180.97,72.39 179.07,72.39 177.16,74.3 SV4.17
N$52
  Top 0.406: T20.C 184.15,70.48 SV4.19
N$53
  Top 0.406: T19.C 188.59,70.48 187.01,72.07 184.47,72.07 182.24,74.3 SV4.21
N$54
  Top 0.406: T13.C 203.83,71.12 200.66,74.3 196.85,74.3 189.86,81.28 183.51,81.28 SV4.20
N$55
  Top 0.406: T14.C 201.29,71.76 200.02,73.03 196.22,73.03 189.23,80.01 184.78,80.01 SV4.22
N$56
  Top 0.406: T15.C 198.75,70.48 197.48,71.76 195.58,71.76 188.59,78.74 186.05,78.74 SV4.24
N$57
  Top 0.406: T18.C 188.59,73.03 186.05,73.03 184.78,74.3 SV4.23
N$58
  Top 0.406: T17.C 193.67,69.85 188.59,74.93 SV4.25
N$59
  Top 0.406: T16.C 194.94,70.48 187.96,77.47 SV4.26
N$60
  Top 0.406: X2.1 183.51,34.92 163.19,34.92 158.11,29.84 145.41,29.84 144.14,31.11 X1.1 144.14,34.29 143.51,34.92 141.6,34.92 140.33,36.2 140.33,48.26 141.6,49.53 R26.2 141.6,55.24 142.88,56.51 142.88,59.05 R13.2
N$61  (via drill 0.6 pad 1.27)
  Top 0.406: IC1.9 v141.6,43.81 | v174.62,43.81 175.89,42.54 IC2.14
  Bottom 0.406: v141.6,43.81 v174.62,43.81
N$62  (via drill 0.6 pad 1.27)
  Top 0.406: IC2.9 163.19,39.37 v164.47,40.64 | IC3.14 197.48,39.37 v196.22,40.64
  Bottom 0.406: v164.47,40.64 v196.22,40.64
N$63  (via drill 0.6 pad 1.27)
  Top 0.406: IC3.9 v184.78,41.91 | v201.29,41.91 201.29,37.46 200.02,36.2 198.75,36.2 197.48,34.92 X2.6
  Bottom 0.406: v184.78,41.91 v201.29,41.91
N$64
  Top 0.406: X1.6 156.84,36.2 IC1.14
N$65  (via drill 0.6 pad 1.27)
  Top 0.406: IC1.11 148.59,36.83 149.22,36.83 150.49,35.56 150.49,32.38 151.76,31.11 154.3,31.11 | 154.3,31.11 X1.5 | 168.27,36.2 162.56,36.2 157.48,31.11 154.3,31.11 | IC2.11 168.27,36.2 | 168.27,36.2 188.59,36.2 189.86,37.46 IC3.11 v189.86,42.54 | v197.48,42.54 198.75,41.27 198.75,37.46 198.12,36.83 196.22,36.83 194.94,35.56 X2.5
  Bottom 0.406: v189.86,42.54 v197.48,42.54
N$66  (via drill 0.6 pad 1.27)
  Top 0.406: X1.4 151.76,36.2 IC1.12 149.22,40 v150.49,41.27 | IC2.12 170.81,41.27 | v167,41.27 170.81,41.27 | 170.81,41.27 v172.08,41.27 | v192.41,41.27 IC3.12 X2.4
  Bottom 0.406: v167,41.27 v150.49,41.27 | v172.08,41.27 v192.41,41.27
N$67
  Top 0.406: T1.C 173.35,71.12 SV4.11
N$68
  Top 0.406: SV4.14 172.08,78.74 170.81,80.01 149.86,80.01 140.33,70.48 140.33,59.05 R26.1
N$69
  Top 0.406: SV4.13 170.81,76.2 170.81,78.11 170.18,78.74 150.49,78.74 141.6,69.85 R13.1
N$70
  Top 0.406: T12.C 152.4,77.47 SV4.2
N$71
  Top 0.406: T11.C 147.95,70.48 152.4,74.93 SV4.1
N$72
  Top 0.406: T10.C 153.03,73.03 156.84,73.03 158.11,74.3 158.11,76.2 SV4.4
N$73  (via drill 1.2 pad 2.54)
  other vias: 140.97,31.11
N$74  (via drill 1.2 pad 2.54)
  other vias: 140.97,80.01
N$75
  Top 0.406: R12.1 IC1.7
N$76
  Top 0.406: R11.1 IC1.6
N$77
  Top 0.406: R10.1 IC1.5
N$78
  Top 0.406: R9.1 IC1.4
N$79
  Top 0.406: R8.1 IC1.3
N$80
  Top 0.406: R7.1 IC1.2
N$81
  Top 0.406: R6.1 IC1.1
N$82
  Top 0.406: R5.1 161.92,48.89 161.29,48.26 161.29,45.08 160.02,43.81 158.11,43.81 156.84,42.54 IC1.15 156.84,40
N$83  (via drill 1.2 pad 2.54)
  other vias: 203.83,80.01
N$84
  Top 0.406: R4.1 165.73,48.89 IC2.7
N$85
  Top 0.406: R3.1 168.27,48.89 IC2.6
N$86
  Top 0.406: R2.1 170.81,48.89 IC2.5
N$87
  Top 0.406: R1.1 173.35,48.89 IC2.4
N$88
  Top 0.406: R25.1 175.89,48.89 IC2.3
N$89
  Top 0.406: R24.1 178.44,48.89 IC2.2
N$90
  Top 0.406: R23.1 180.97,48.89 IC2.1
N$91
  Top 0.406: R22.1 182.24,48.89 182.88,48.26 182.88,45.08 181.61,43.81 179.7,43.81 178.44,42.54 IC2.15
N$92
  Top 0.406: R21.1 187.32,47.62 IC3.7
N$93
  Top 0.406: R20.1 189.86,47.62 IC3.6
N$94
  Top 0.406: R19.1 192.41,47.62 IC3.5
N$95
  Top 0.406: R18.1 194.94,47.62 IC3.4
N$96
  Top 0.406: R17.1 197.48,47.62 IC3.3
N$97
  Top 0.406: R16.1 200.02,47.62 IC3.2
N$98
  Top 0.406: R15.1 202.56,47.62 IC3.1
N$99
  Top 0.406: R14.1 202.56,49.53 203.83,48.26 203.83,45.08 203.2,44.45 201.93,44.45 200.02,42.54 IC3.15
N$100  (via drill 1.2 pad 2.54)
  other vias: 203.83,31.11
N$101
  Top 0.406: T36.B 74.93,66.67 R38.2
N$102
  Top 0.406: T35.B 77.47,60.96 R37.2
N$103
  Top 0.406: T34.B 80.01,66.67 R36.2
N$104
  Top 0.406: T33.B 82.55,60.96 R35.2
N$105
  Top 0.406: R34.2 85.09,66.67 T32.B
N$106
  Top 0.406: R33.2 87.63,60.96 T31.B
N$107
  Top 0.406: R32.2 90.17,66.67 T30.B
N$108
  Top 0.406: R31.2 92.71,60.96 T29.B
N$109
  Top 0.406: R30.2 95.25,66.67 T28.B
N$110
  Top 0.406: R29.2 97.79,60.96 T27.B
N$111
  Top 0.406: R28.2 100.33,66.67 T26.B
N$112
  Top 0.406: R27.2 102.87,60.96 T25.B
N$113
  Top 0.406: T33.C 83.82,70.48 85.09,71.76 87.63,71.76 90.17,74.3 SV5.3
N$114
  Top 0.406: T32.C 87.63,70.48 91.44,74.3 91.44,76.2 SV5.6
N$115
  Top 0.406: T31.C 88.9,70.17 92.71,73.98 SV5.5
N$116
  Top 0.406: T26.C 99.06,73.03 99.06,76.2 SV5.12
N$117
  Top 0.406: T27.C 99.06,71.12 97.79,72.39 SV5.9
N$118
  Top 0.406: T30.C 93.98,73.03 93.98,76.2 SV5.8
N$119
  Top 0.406: T29.C 93.98,71.12 95.25,72.39 SV5.7
N$120
  Top 0.406: T28.C 96.52,76.2 SV5.10
N$121
  Top 0.406: T48.B 105.41,66.67 R51.2
N$122
  Top 0.406: T47.B 107.95,60.96 R50.2
N$123
  Top 0.406: T46.B 110.49,66.67 R49.2
N$124
  Top 0.406: T45.B 113.03,60.96 R48.2
N$125
  Top 0.406: R47.2 115.57,66.67 T44.B
N$126
  Top 0.406: R46.2 118.11,60.96 T43.B
N$127
  Top 0.406: R45.2 120.65,66.67 T42.B
N$128
  Top 0.406: R44.2 123.19,60.96 T41.B
N$129
  Top 0.406: R43.2 125.73,66.67 T40.B
N$130
  Top 0.406: R42.2 128.27,60.96 T39.B
N$131
  Top 0.406: R41.2 130.81,66.67 T38.B
N$132
  Top 0.406: R40.2 133.35,60.96 T37.B
N$133
  Top 0.406: T48.C 104.14,73.03 104.14,76.2 SV5.16
N$134
  Top 0.406: T47.C 109.22,69.85 105.41,73.66 SV5.15
N$135
  Top 0.406: T46.C 109.86,70.48 106.68,73.66 106.68,76.2 SV5.18
N$136
  Top 0.406: T45.C 114.3,69.85 111.76,72.39 109.86,72.39 107.95,74.3 SV5.17
N$137
  Top 0.406: T44.C 114.94,70.48 SV5.19
N$138
  Top 0.406: T43.C 119.38,70.48 117.79,72.07 115.25,72.07 113.03,74.3 SV5.21
N$139
  Top 0.406: T37.C 134.62,71.12 131.44,74.3 127.64,74.3 120.65,81.28 114.3,81.28 SV5.20
N$140
  Top 0.406: T38.C 132.08,71.76 130.81,73.03 127,73.03 120.02,80.01 115.57,80.01 SV5.22
N$141
  Top 0.406: T39.C 129.54,70.48 128.27,71.76 126.37,71.76 119.38,78.74 116.84,78.74 SV5.24
N$142
  Top 0.406: T42.C 119.38,73.03 116.84,73.03 115.57,74.3 SV5.23
N$143
  Top 0.406: T41.C 124.46,69.85 119.38,74.93 SV5.25
N$144
  Top 0.406: T40.C 125.73,70.48 118.75,77.47 SV5.26
N$145
  Top 0.406: R38.1 IC4.7
N$146
  Top 0.406: R37.1 IC4.6
N$147
  Top 0.406: R36.1 IC4.5
N$148
  Top 0.406: R35.1 IC4.4
N$149
  Top 0.406: R34.1 IC4.3
N$150
  Top 0.406: R33.1 IC4.2
N$151
  Top 0.406: R32.1 IC4.1
N$152
  Top 0.406: R31.1 92.71,48.89 92.08,48.26 92.08,45.08 90.81,43.81 88.9,43.81 87.63,42.54 IC4.15 87.63,40
N$153
  Top 0.406: R30.1 96.52,48.89 IC5.7
N$154
  Top 0.406: R29.1 99.06,48.89 IC5.6
N$155
  Top 0.406: R28.1 101.6,48.89 IC5.5
N$156
  Top 0.406: R27.1 104.14,48.89 IC5.4
N$157
  Top 0.406: R51.1 106.68,48.89 IC5.3
N$158
  Top 0.406: R50.1 109.22,48.89 IC5.2
N$159
  Top 0.406: R49.1 111.76,48.89 IC5.1
N$160
  Top 0.406: R48.1 113.03,48.89 113.67,48.26 113.67,45.08 112.4,43.81 110.49,43.81 109.22,42.54 IC5.15
N$161
  Top 0.406: R47.1 118.11,47.62 IC6.7
N$162
  Top 0.406: R46.1 120.65,47.62 IC6.6
N$163
  Top 0.406: R45.1 123.19,47.62 IC6.5
N$164
  Top 0.406: R44.1 125.73,47.62 IC6.4
N$165
  Top 0.406: R43.1 128.27,47.62 IC6.3
N$166
  Top 0.406: R42.1 130.81,47.62 IC6.2
N$167
  Top 0.406: R41.1 133.35,47.62 IC6.1
N$168
  Top 0.406: R40.1 133.35,49.53 134.62,48.26 134.62,45.08 133.98,44.45 132.72,44.45 130.81,42.54 IC6.15
N$169
  Top 0.406: X4.1 114.3,34.92 93.98,34.92 88.9,29.84 76.2,29.84 74.93,31.11 X3.1 74.93,34.29 74.3,34.92 72.39,34.92 71.12,36.2 71.12,48.26 72.39,49.53 R52.2 72.39,55.24 73.66,56.51 73.66,59.05 R39.2
N$170  (via drill 0.6 pad 1.27)
  Top 0.406: IC4.9 v72.39,43.81 | v105.41,43.81 106.68,42.54 IC5.14
  Bottom 0.406: v72.39,43.81 v105.41,43.81
N$171  (via drill 0.6 pad 1.27)
  Top 0.406: IC5.9 93.98,39.37 v95.25,40.64 | IC6.14 128.27,39.37 v127,40.64
  Bottom 0.406: v95.25,40.64 v127,40.64
N$172  (via drill 0.6 pad 1.27)
  Top 0.406: IC6.9 v115.57,41.91 | v132.08,41.91 132.08,37.46 130.81,36.2 129.54,36.2 128.27,34.92 X4.6
  Bottom 0.406: v115.57,41.91 v132.08,41.91
N$173
  Top 0.406: X3.6 87.63,36.2 IC4.14
N$174  (via drill 0.6 pad 1.27)
  Top 0.406: IC4.11 79.38,36.83 80.01,36.83 81.28,35.56 81.28,32.38 82.55,31.11 85.09,31.11 | 85.09,31.11 X3.5 | 99.06,36.2 93.34,36.2 88.27,31.11 85.09,31.11 | IC5.11 99.06,36.2 | 99.06,36.2 119.38,36.2 120.65,37.46 IC6.11 v120.65,42.54 | v128.27,42.54 129.54,41.27 129.54,37.46 128.91,36.83 127,36.83 125.73,35.56 X4.5
  Bottom 0.406: v120.65,42.54 v128.27,42.54
N$175  (via drill 0.6 pad 1.27)
  Top 0.406: X3.4 82.55,36.2 IC4.12 80.01,40 v81.28,41.27 | IC5.12 101.6,41.27 | v97.79,41.27 101.6,41.27 | 101.6,41.27 v102.87,41.27 | v123.19,41.27 IC6.12 X4.4
  Bottom 0.406: v97.79,41.27 v81.28,41.27 | v102.87,41.27 v123.19,41.27
N$176
  Top 0.406: T25.C 104.14,71.12 SV5.11
N$177
  Top 0.406: SV5.14 102.87,78.74 101.6,80.01 80.65,80.01 71.12,70.48 71.12,59.05 R52.1
N$178
  Top 0.406: SV5.13 101.6,76.2 101.6,78.11 100.97,78.74 81.28,78.74 72.39,69.85 R39.1
N$179
  Top 0.406: T36.C 83.19,77.47 SV5.2
N$180
  Top 0.406: T35.C 78.74,70.48 83.19,74.93 SV5.1
N$181
  Top 0.406: T34.C 83.82,73.03 87.63,73.03 88.9,74.3 88.9,76.2 SV5.4
N$182  (via drill 1.2 pad 2.54)
  other vias: 71.76,31.11
N$183  (via drill 1.2 pad 2.54)
  other vias: 71.76,80.01
N$184  (via drill 1.2 pad 2.54)
  other vias: 134.62,80.01
N$185  (via drill 1.2 pad 2.54)
  other vias: 134.62,31.11
N$186
  Top 0.406: T60.B 5.71,66.67 R64.2
N$187
  Top 0.406: T59.B 8.26,60.96 R63.2
N$188
  Top 0.406: T58.B 10.79,66.67 R62.2
N$189
  Top 0.406: T57.B 13.34,60.96 R61.2
N$190
  Top 0.406: R60.2 15.88,66.67 T56.B
N$191
  Top 0.406: R59.2 18.41,60.96 T55.B
N$192
  Top 0.406: R58.2 20.96,66.67 T54.B
N$193
  Top 0.406: R57.2 23.5,60.96 T53.B
N$194
  Top 0.406: R56.2 26.04,66.67 T52.B
N$195
  Top 0.406: R55.2 28.57,60.96 T51.B
N$196
  Top 0.406: R54.2 31.11,66.67 T50.B
N$197
  Top 0.406: R53.2 33.65,60.96 T49.B
N$198
  Top 0.406: T57.C 14.61,70.48 15.88,71.76 18.41,71.76 20.96,74.3 SV6.3
N$199
  Top 0.406: T56.C 18.41,70.48 22.23,74.3 22.23,76.2 SV6.6
N$200
  Top 0.406: T55.C 19.68,70.17 23.5,73.98 SV6.5
N$201
  Top 0.406: T50.C 29.84,73.03 29.84,76.2 SV6.12
N$202
  Top 0.406: T51.C 29.84,71.12 28.57,72.39 SV6.9
N$203
  Top 0.406: T54.C 24.77,73.03 24.77,76.2 SV6.8
N$204
  Top 0.406: T53.C 24.77,71.12 26.04,72.39 SV6.7
N$205
  Top 0.406: T52.C 27.3,76.2 SV6.10
N$206
  Top 0.406: T72.B 36.2,66.67 R77.2
N$207
  Top 0.406: T71.B 38.73,60.96 R76.2
N$208
  Top 0.406: T70.B 41.27,66.67 R75.2
N$209
  Top 0.406: T69.B 43.81,60.96 R74.2
N$210
  Top 0.406: R73.2 46.35,66.67 T68.B
N$211
  Top 0.406: R72.2 48.89,60.96 T67.B
N$212
  Top 0.406: R71.2 51.43,66.67 T66.B
N$213
  Top 0.406: R70.2 53.97,60.96 T65.B
N$214
  Top 0.406: R69.2 56.51,66.67 T64.B
N$215
  Top 0.406: R68.2 59.05,60.96 T63.B
N$216
  Top 0.406: R67.2 61.59,66.67 T62.B
N$217
  Top 0.406: R66.2 64.14,60.96 T61.B
N$218
  Top 0.406: T72.C 34.92,73.03 34.92,76.2 SV6.16
N$219
  Top 0.406: T71.C 40,69.85 36.2,73.66 SV6.15
N$220
  Top 0.406: T70.C 40.64,70.48 37.46,73.66 37.46,76.2 SV6.18
N$221
  Top 0.406: T69.C 45.08,69.85 42.54,72.39 40.64,72.39 38.73,74.3 SV6.17
N$222
  Top 0.406: T68.C 45.72,70.48 SV6.19
N$223
  Top 0.406: T67.C 50.16,70.48 48.58,72.07 46.04,72.07 43.81,74.3 SV6.21
N$224
  Top 0.406: T61.C 65.41,71.12 62.23,74.3 58.42,74.3 51.43,81.28 45.08,81.28 SV6.20
N$225
  Top 0.406: T62.C 62.87,71.76 61.59,73.03 57.78,73.03 50.8,80.01 46.35,80.01 SV6.22
N$226
  Top 0.406: T63.C 60.32,70.48 59.05,71.76 57.15,71.76 50.16,78.74 47.62,78.74 SV6.24
N$227
  Top 0.406: T66.C 50.16,73.03 47.62,73.03 46.35,74.3 SV6.23
N$228
  Top 0.406: T65.C 55.24,69.85 50.16,74.93 SV6.25
N$229
  Top 0.406: T64.C 56.51,70.48 49.53,77.47 SV6.26
N$230
  Top 0.406: R64.1 IC7.7
N$231
  Top 0.406: R63.1 IC7.6
N$232
  Top 0.406: R62.1 IC7.5
N$233
  Top 0.406: R61.1 IC7.4
N$234
  Top 0.406: R60.1 IC7.3
N$235
  Top 0.406: R59.1 IC7.2
N$236
  Top 0.406: R58.1 IC7.1
N$237
  Top 0.406: R57.1 23.5,48.89 22.86,48.26 22.86,45.08 21.59,43.81 19.68,43.81 18.41,42.54 IC7.15 18.41,40
N$238
  Top 0.406: R56.1 27.3,48.89 IC8.7
N$239
  Top 0.406: R55.1 29.84,48.89 IC8.6
N$240
  Top 0.406: R54.1 32.38,48.89 IC8.5
N$241
  Top 0.406: R53.1 34.92,48.89 IC8.4
N$242
  Top 0.406: R77.1 37.46,48.89 IC8.3
N$243
  Top 0.406: R76.1 40,48.89 IC8.2
N$244
  Top 0.406: R75.1 42.54,48.89 IC8.1
N$245
  Top 0.406: R74.1 43.81,48.89 44.45,48.26 44.45,45.08 43.18,43.81 41.27,43.81 40,42.54 IC8.15
N$246
  Top 0.406: R73.1 48.89,47.62 IC9.7
N$247
  Top 0.406: R72.1 51.43,47.62 IC9.6
N$248
  Top 0.406: R71.1 53.97,47.62 IC9.5
N$249
  Top 0.406: R70.1 56.51,47.62 IC9.4
N$250
  Top 0.406: R69.1 59.05,47.62 IC9.3
N$251
  Top 0.406: R68.1 61.59,47.62 IC9.2
N$252
  Top 0.406: R67.1 64.14,47.62 IC9.1
N$253
  Top 0.406: R66.1 64.14,49.53 65.41,48.26 65.41,45.08 64.77,44.45 63.5,44.45 61.59,42.54 IC9.15
N$254
  Top 0.406: X6.1 45.08,34.92 24.77,34.92 19.68,29.84 6.99,29.84 5.71,31.11 X5.1 5.71,34.29 5.08,34.92 3.18,34.92 1.9,36.2 1.9,48.26 3.18,49.53 R78.2 3.18,55.24 4.45,56.51 4.45,59.05 R65.2
N$255  (via drill 0.6 pad 1.27)
  Top 0.406: IC7.9 v3.18,43.81 | v36.2,43.81 37.46,42.54 IC8.14
  Bottom 0.406: v3.18,43.81 v36.2,43.81
N$256  (via drill 0.6 pad 1.27)
  Top 0.406: IC8.9 24.77,39.37 v26.04,40.64 | IC9.14 59.05,39.37 v57.78,40.64
  Bottom 0.406: v26.04,40.64 v57.78,40.64
N$257  (via drill 0.6 pad 1.27)
  Top 0.406: IC9.9 v46.35,41.91 | v62.87,41.91 62.87,37.46 61.59,36.2 60.32,36.2 59.05,34.92 X6.6
  Bottom 0.406: v46.35,41.91 v62.87,41.91
N$258
  Top 0.406: X5.6 18.41,36.2 IC7.14
N$259  (via drill 0.6 pad 1.27)
  Top 0.406: IC7.11 10.16,36.83 10.79,36.83 12.07,35.56 12.07,32.38 13.34,31.11 15.88,31.11 | 15.88,31.11 X5.5 | 29.84,36.2 24.13,36.2 19.05,31.11 15.88,31.11 | IC8.11 29.84,36.2 | 29.84,36.2 50.16,36.2 51.43,37.46 IC9.11 v51.43,42.54 | v59.05,42.54 60.32,41.27 60.32,37.46 59.69,36.83 57.78,36.83 56.51,35.56 X6.5
  Bottom 0.406: v51.43,42.54 v59.05,42.54
N$260  (via drill 0.6 pad 1.27)
  Top 0.406: X5.4 13.34,36.2 IC7.12 10.79,40 v12.07,41.27 | IC8.12 32.38,41.27 | v28.57,41.27 32.38,41.27 | 32.38,41.27 v33.65,41.27 | v53.97,41.27 IC9.12 X6.4
  Bottom 0.406: v28.57,41.27 v12.07,41.27 | v33.65,41.27 v53.97,41.27
N$261
  Top 0.406: T49.C 34.92,71.12 SV6.11
N$262
  Top 0.406: SV6.14 33.65,78.74 32.38,80.01 11.43,80.01 1.9,70.48 1.9,59.05 R78.1
N$263
  Top 0.406: SV6.13 32.38,76.2 32.38,78.11 31.75,78.74 12.07,78.74 3.17,69.85 R65.1
N$264
  Top 0.406: T60.C 13.97,77.47 SV6.2
N$265
  Top 0.406: T59.C 9.53,70.48 13.97,74.93 SV6.1
N$266
  Top 0.406: T58.C 14.61,73.03 18.41,73.03 19.68,74.3 19.68,76.2 SV6.4
N$267  (via drill 1.2 pad 2.54)
  other vias: 2.54,31.11
N$268  (via drill 1.2 pad 2.54)
  other vias: 2.54,80.01
N$269  (via drill 1.2 pad 2.54)
  other vias: 65.41,80.01
N$270  (via drill 1.2 pad 2.54)
  other vias: 65.41,31.11
VCC  (via drill 0.6 pad 1.27)
  Top 0.406: X1.3 149.22,34.92 147.95,36.2 146.69,36.2 IC1.10 144.14,41.27 145.41,42.54 v146.69,42.54 | IC1.16 v159.38,42.54 | v159.38,42.54 164.47,42.54 | 165.73,42.54 IC2.10 | IC2.16 v180.97,42.54 181.61,43.18 v183.51,43.18 185.42,43.18 187.32,41.27 IC3.10 | v159.38,42.54 165.73,42.54 | 165.73,42.54 v169.54,42.54 | v202.56,43.18 IC3.16 202.56,37.46 199.39,34.29 199.39,32.38 198.12,31.11 191.13,31.11 189.86,32.38 X2.3
  Bottom 0.406: v146.69,42.54 v159.38,42.54 | v169.54,42.54 v180.97,42.54 | v202.56,43.18 v183.51,43.18
VCC1  (via drill 0.6 pad 1.27)
  Top 0.406: X3.3 80.01,34.92 78.74,36.2 77.47,36.2 IC4.10 74.93,41.27 76.2,42.54 v77.47,42.54 | IC4.16 v90.17,42.54 | v90.17,42.54 95.25,42.54 | 96.52,42.54 IC5.10 | IC5.16 v111.76,42.54 112.4,43.18 v114.3,43.18 116.2,43.18 118.11,41.27 IC6.10 | v90.17,42.54 96.52,42.54 | 96.52,42.54 v100.33,42.54 | v133.35,43.18 IC6.16 133.35,37.46 130.17,34.29 130.17,32.38 128.91,31.11 121.92,31.11 120.65,32.38 X4.3
  Bottom 0.406: v77.47,42.54 v90.17,42.54 | v100.33,42.54 v111.76,42.54 | v133.35,43.18 v114.3,43.18
VCC2  (via drill 0.6 pad 1.27)
  Top 0.406: X5.3 10.79,34.92 9.53,36.2 8.26,36.2 IC7.10 5.71,41.27 6.99,42.54 v8.26,42.54 | IC7.16 v20.96,42.54 | v20.96,42.54 26.04,42.54 | 27.3,42.54 IC8.10 | IC8.16 v42.54,42.54 43.18,43.18 v45.08,43.18 46.99,43.18 48.89,41.27 IC9.10 | v20.96,42.54 27.3,42.54 | 27.3,42.54 v31.11,42.54 | v64.14,43.18 IC9.16 64.14,37.46 60.96,34.29 60.96,32.38 59.69,31.11 52.7,31.11 51.43,32.38 X6.3
  Bottom 0.406: v8.26,42.54 v20.96,42.54 | v31.11,42.54 v42.54,42.54 | v64.14,43.18 v45.08,43.18

## Text on the board
Top: KJ-3 | KJ-3 | KJ-3 | KJ-3 | v1.0.0